# EAGLE board TabStopsDriver (EAGLE 9.6.2)
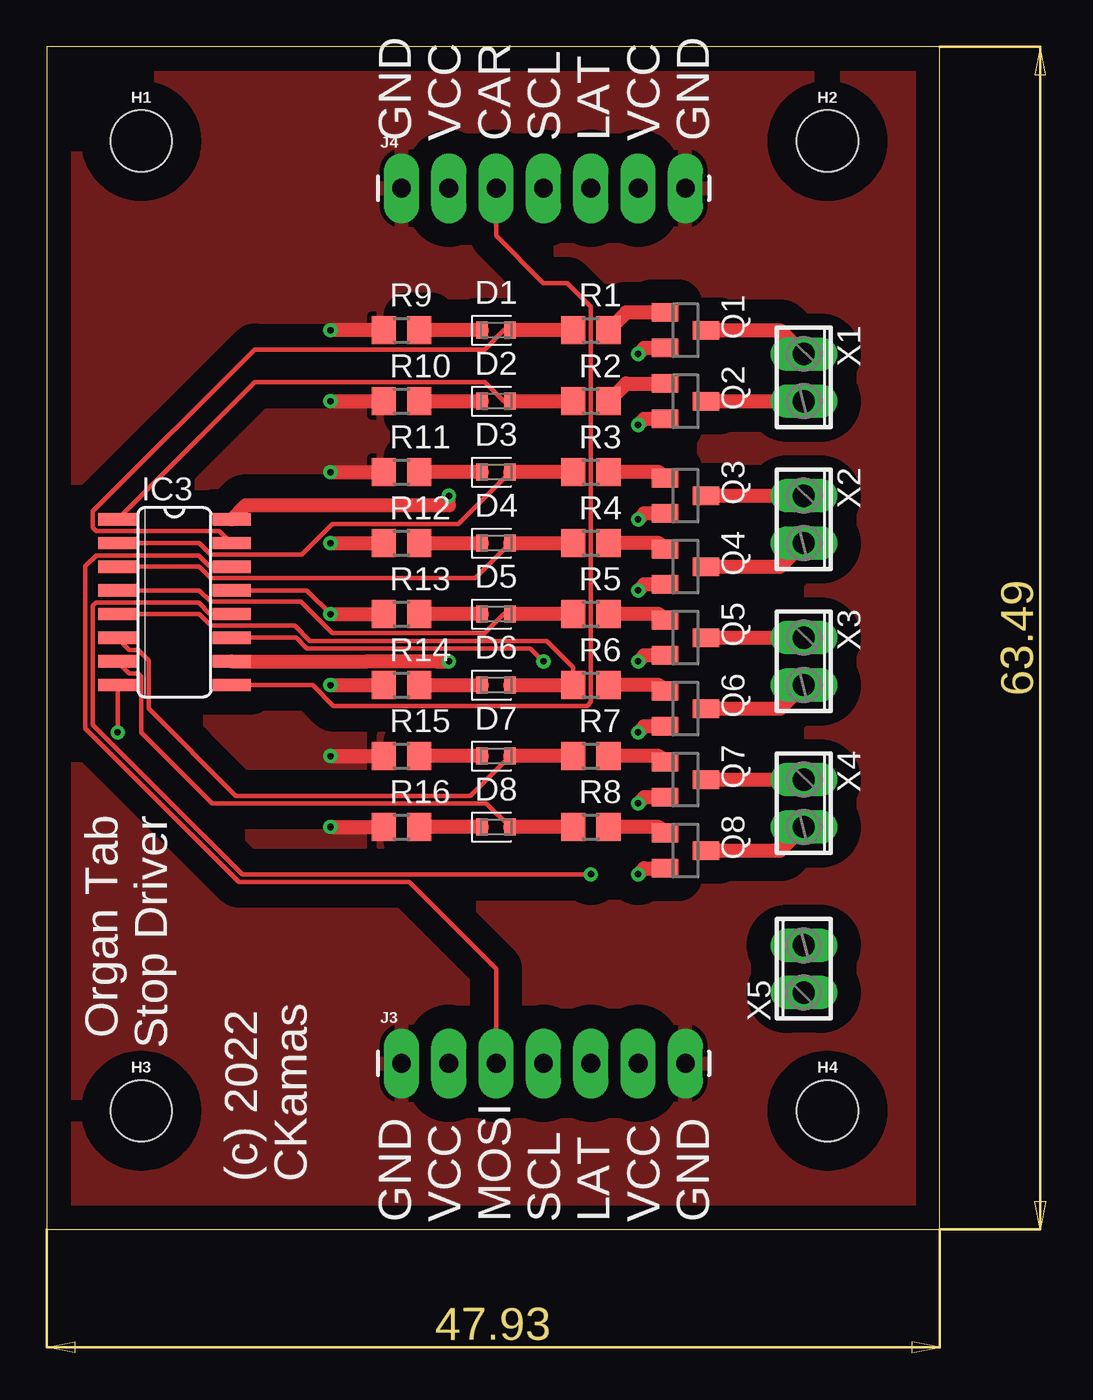
[diagram p0: board, top side]
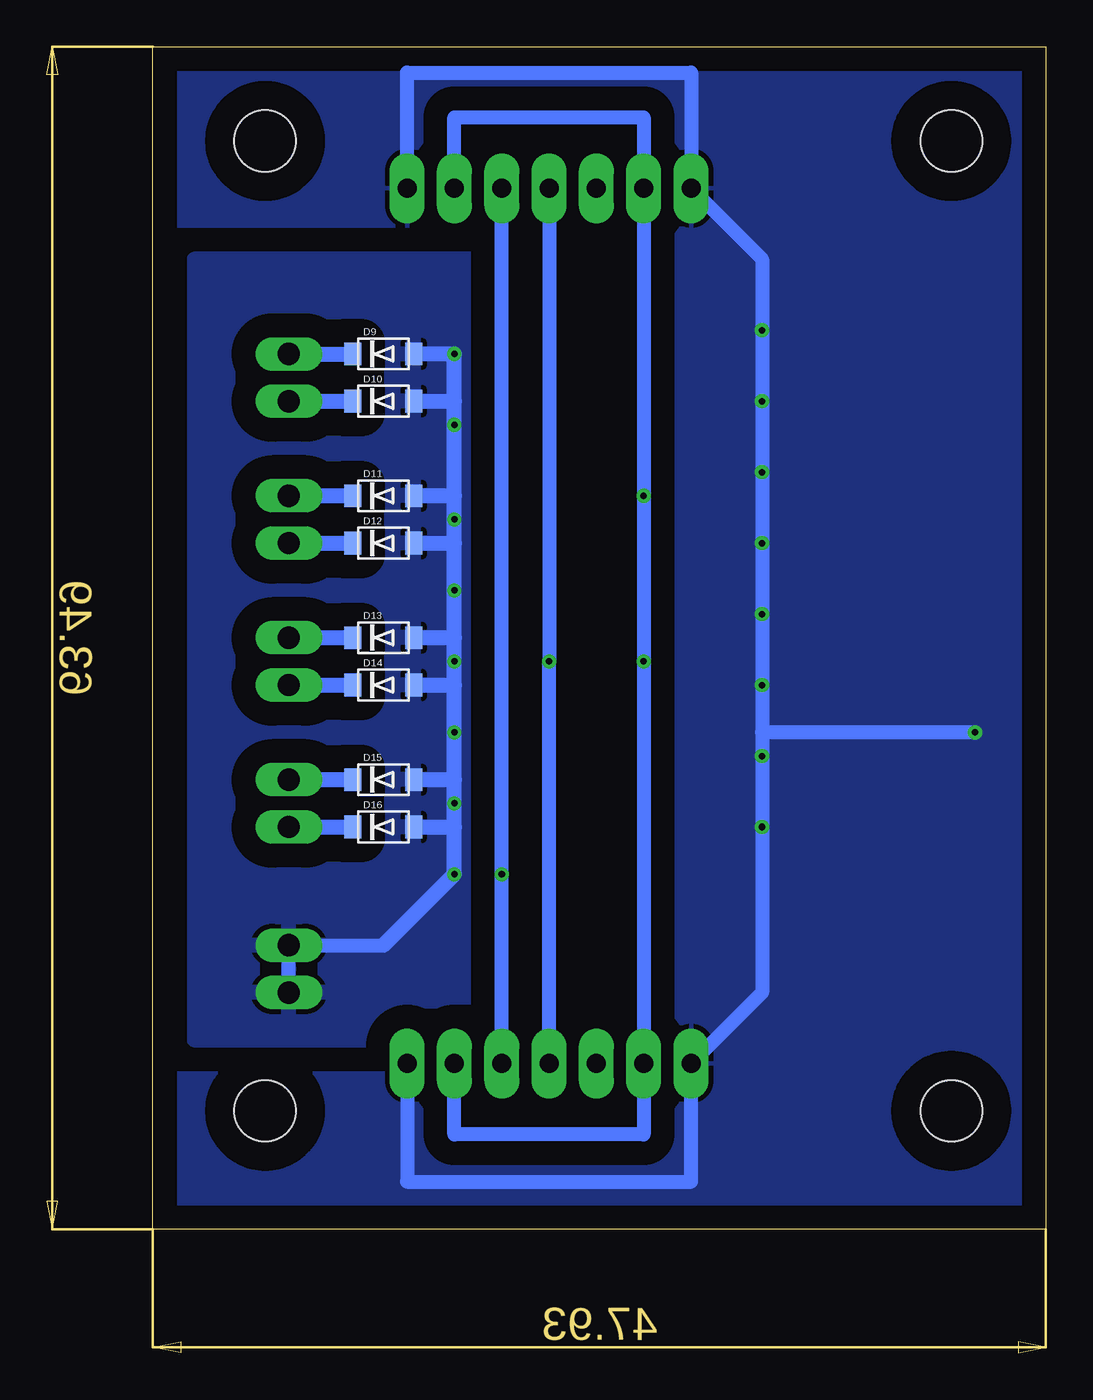
[diagram p1: board, bottom side, seen from below]

Size 47.93 x 63.49 mm. Coordinates in mm from the lower left corner, seen from the top.
Outline: 0,0 47.93,0 47.93,63.49 0,63.49 0,0
Copper layers (1*16): Top 0.035mm / dielectric 1.5mm / Bottom 0.035mm
Design rules "default *": minimum track width 6mil, minimum drill 0.35mm, track to track 6mil, track to pad 6mil, pad to pad 6mil, via to via 6mil, smd to smd 6mil, copper to edge 40mil, drill to drill 6mil, minimum pad ring 10mil, minimum via ring 8mil, stop-mask expansion 4mil, vias tented up to drill 0mil, thermal gap 10mil
Net classes: 0 default: width 0.254 mm; 1 power: width 0.762 mm

## Footprints (pad centres in the part's own frame; a part is rotated, then mirrored left to right if it is on the bottom)
LEDC1608X95N_RND-R = smd 0.612 x 0.912: A 0.75,0; C -0.75,0
SOD-123FL = smd 0.91 x 1.22: A 1.637,0; C -1.637,0
STAND-OFF = hole 3.302: 0,0
SO16 = smd 0.66 x 2.032: 1 -4.445,-3.073; 2 -3.175,-3.073; 3 -1.905,-3.073; 4 -0.635,-3.073; 5 0.635,-3.073; 6 1.905,-3.073; 7 3.175,-3.073; 8 4.445,-3.073; 9 4.445,3.073; 10 3.175,3.073; 11 1.905,3.073; 12 0.635,3.073; 13 -0.635,3.073; 14 -1.905,3.073; 15 -3.175,3.073; 16 -4.445,3.073
1X07_LONGPADS = drill 1.016 pad 1.88 long: 1 0,0; 2 2.54,0; 3 5.08,0; 4 7.62,0; 5 10.16,0; 6 12.7,0; 7 15.24,0
SOT23 = smd 1 x 1.4: 1 -0.95,-1.1; 2 0.95,-1.1; 3 0,1.1
R0805 = smd 1.3 x 1.5: 1 -0.95,0; 2 0.95,0
2POL254 = drill 1.2 long: 1 -1.27,0; 2 1.27,0

## Placement (x,y rotation side)
D1  B1911NB--20C005314U1930  [LEDC1608X95N_RND-R]  24.13,48.26 0 top
D2  B1911NB--20C005314U1930  [LEDC1608X95N_RND-R]  24.13,44.45 0 top
D3  B1911NB--20C005314U1930  [LEDC1608X95N_RND-R]  24.13,40.64 0 top
D4  B1911NB--20C005314U1930  [LEDC1608X95N_RND-R]  24.13,36.83 0 top
D5  B1911NB--20C005314U1930  [LEDC1608X95N_RND-R]  24.13,33.02 0 top
D6  B1911NB--20C005314U1930  [LEDC1608X95N_RND-R]  24.13,29.21 0 top
D7  B1911NB--20C005314U1930  [LEDC1608X95N_RND-R]  24.13,25.4 0 top
D8  B1911NB--20C005314U1930  [LEDC1608X95N_RND-R]  24.13,21.59 0 top
D9  GS1508FL_R1_00001  [SOD-123FL]  35.56,46.99 0 bottom
D10  GS1508FL_R1_00001  [SOD-123FL]  35.56,44.45 0 bottom
D11  GS1508FL_R1_00001  [SOD-123FL]  35.56,39.37 0 bottom
D12  GS1508FL_R1_00001  [SOD-123FL]  35.56,36.83 0 bottom
D13  GS1508FL_R1_00001  [SOD-123FL]  35.56,31.75 0 bottom
D14  GS1508FL_R1_00001  [SOD-123FL]  35.56,29.21 0 bottom
D15  GS1508FL_R1_00001  [SOD-123FL]  35.56,24.13 0 bottom
D16  GS1508FL_R1_00001  [SOD-123FL]  35.56,21.59 0 bottom
H1  STAND-OFF  [STAND-OFF]  5.08,58.42 0 top
H2  STAND-OFF  [STAND-OFF]  41.91,58.42 0 top
H3  STAND-OFF  [STAND-OFF]  5.08,6.35 0 top
H4  STAND-OFF  [STAND-OFF]  41.91,6.35 0 top
IC3  74LS595D  [SO16]  6.86,33.66 270 top
J3  S1111E-07-ND  [1X07_LONGPADS]  19.05,8.89 0 top
J4  S5482-ND  [1X07_LONGPADS]  19.05,55.88 0 top
Q1  3757-PJA3416A_R1_00001CT-ND  [SOT23]  34.29,48.26 270 top
Q2  3757-PJA3416A_R1_00001CT-ND  [SOT23]  34.29,44.45 270 top
Q3  3757-PJA3416A_R1_00001CT-ND  [SOT23]  34.29,39.37 270 top
Q4  3757-PJA3416A_R1_00001CT-ND  [SOT23]  34.29,35.56 270 top
Q5  3757-PJA3416A_R1_00001CT-ND  [SOT23]  34.29,31.75 270 top
Q6  3757-PJA3416A_R1_00001CT-ND  [SOT23]  34.29,27.94 270 top
Q7  3757-PJA3416A_R1_00001CT-ND  [SOT23]  34.29,24.13 270 top
Q8  3757-PJA3416A_R1_00001CT-ND  [SOT23]  34.29,20.32 270 top
R1  RMCF0805FT100RCT-ND  [R0805]  29.21,48.26 0 top
R2  RMCF0805FT100RCT-ND  [R0805]  29.21,44.45 0 top
R3  RMCF0805FT100RCT-ND  [R0805]  29.21,40.64 0 top
R4  RMCF0805FT100RCT-ND  [R0805]  29.21,36.83 0 top
R5  RMCF0805FT100RCT-ND  [R0805]  29.21,33.02 0 top
R6  RMCF0805FT100RCT-ND  [R0805]  29.21,29.21 0 top
R7  RMCF0805FT100RCT-ND  [R0805]  29.21,25.4 0 top
R8  RMCF0805FT100RCT-ND  [R0805]  29.21,21.59 0 top
R9  RMCF0805FT1K50CT-ND  [R0805]  19.05,48.26 0 top
R10  RMCF0805FT1K50CT-ND  [R0805]  19.05,44.45 0 top
R11  RMCF0805FT1K50CT-ND  [R0805]  19.05,40.64 0 top
R12  RMCF0805FT1K50CT-ND  [R0805]  19.05,36.83 0 top
R13  RMCF0805FT1K50CT-ND  [R0805]  19.05,33.02 0 top
R14  RMCF0805FT1K50CT-ND  [R0805]  19.05,29.21 0 top
R15  RMCF0805FT1K50CT-ND  [R0805]  19.05,25.4 0 top
R16  RMCF0805FT1K50CT-ND  [R0805]  19.05,21.59 0 top
X1  277-6156-ND  [2POL254]  40.64,45.72 270 top
X2  277-6156-ND  [2POL254]  40.64,38.1 270 top
X3  277-6156-ND  [2POL254]  40.64,30.48 270 top
X4  277-6156-ND  [2POL254]  40.64,22.86 270 top
X5  277-6156-ND  [2POL254]  40.64,13.97 90 top

## Library data of the parts
D1-D8 = LED; CATEGORY: LED; COLOR: RED; DESCRIPTION: CHIP LED ROUND; SUB-CATEGORY: CHIP; TYPE: ROUND_TOP
D9-D16 Q1-Q8 = adafruit
H1-H4 = SparkFun-Hardware
IC3 = 74xx-us
J3 J4 = SparkFun-Connectors
R1-R16 = rcl; SPICEPREFIX: R
X1-X5 = con-phoenix-254; OC_FARNELL: unknown; OC_NEWARK: unknown

## Nets
A: D1.A IC3.15 R1.1
B: D2.A IC3.1 R2.1
C: D3.A IC3.2 R3.1
CARRY: IC3.9 J4.3
D: D4.A IC3.3 R4.1
E: D5.A IC3.4 R5.1
EGND [power]: D9.A D10.A D11.A D12.A D13.A D14.A D15.A D16.A Q1.2 Q2.2 Q3.2 Q4.2 Q5.2 Q6.2 Q7.2 Q8.2 X5.1 X5.2
F: D6.A IC3.5 R6.1
G: D7.A IC3.6 R7.1
GND: IC3.8 IC3.13 J3.1 J3.7 J4.1 J4.7 R9.1 R10.1 R11.1 R12.1 R13.1 R14.1 R15.1 R16.1
H: D8.A IC3.7 R8.1
LATCH: IC3.12 J3.5 J4.5
MOSI: IC3.14 J3.3
N$2: Q3.1 R3.2
N$6: Q2.1 R2.2
N$7: Q1.1 R1.2
N$8: Q4.1 R4.2
N$9: Q6.1 R6.2
N$10: Q5.1 R5.2
N$11: Q7.1 R7.2
N$12: Q8.1 R8.2
N$21 [power]: D9.C Q1.3 X1.1
N$22 [power]: D10.C Q2.3 X1.2
N$23 [power]: D11.C Q3.3 X2.1
N$24 [power]: D12.C Q4.3 X2.2
N$25 [power]: D13.C Q5.3 X3.1
N$26 [power]: D14.C Q6.3 X3.2
N$27 [power]: D15.C Q7.3 X4.1
N$28 [power]: D16.C Q8.3 X4.2
N$29: D1.C R9.2
N$30: D2.C R10.2
N$31: D3.C R11.2
N$32: D4.C R12.2
N$33: D5.C R13.2
N$34: D6.C R14.2
N$35: D7.C R15.2
N$36: D8.C R16.2
SCL: IC3.11 J3.4 J4.4
VCC: IC3.10 IC3.16 J3.2 J3.6 J4.2 J4.6

## Tracks (layer width: path | path; a pad name or v marks a point on that pad's centre or on a via)
A
  Top 0.254: D1.A 24.54,48.26 23.51,47.23 11.17,47.23 2.49,38.55 2.49,37.65 2.65,37.49 9.27,37.49 IC3.15
  Top 0.762: R1.1 D1.A
B
  Top 0.254: D2.A 24.54,44.45 23.51,45.48 11.16,45.48 IC3.1
  Top 0.762: D2.A R2.1
C
  Top 0.254: IC3.2 8.19,36.83 8.8,36.22 13.7,36.22 15.33,37.86 22.1,37.86 D3.A
  Top 0.762: R3.1 D3.A
CARRY
  Top 0.254: IC3.9 14.28,29.21 15.39,28.09 29.01,28.09 29.21,28.3 29.21,49.53 27.94,50.8 26.67,50.8 24.13,53.34 J4.3
D
  Top 0.254: IC3.3 8.19,35.56 8.8,34.95 23,34.95 D4.A
  Top 0.762: D4.A R4.1
E
  Top 0.254: D5.A 24.54,33.02 23.51,31.99 15.33,31.99 13.65,33.68 8.8,33.68 8.19,34.29 IC3.4
  Top 0.762: R5.1 D5.A
EGND  (via drill 0.35)
  Top 0.762: v31.75,46.99 32.07,47.31 Q1.2 | v31.75,19.05 32.07,19.37 Q8.2 | v31.75,26.67 32.07,26.99 Q6.2 | v31.75,30.48 32.07,30.8 Q5.2 | v31.75,34.29 32.07,34.61 Q4.2 | v31.75,38.1 32.07,38.42 Q3.2 | v31.75,43.18 32.07,43.5 Q2.2 | v31.75,22.86 32.07,23.18 Q7.2
  Bottom 0.762: X5.1 X5.2 35.56,15.24
  Bottom 0.813: 35.56,15.24 v31.75,19.05 31.75,21.59 | 31.75,21.59 31.75,24.13 | 31.75,24.13 31.75,29.21 | 31.75,29.21 31.75,31.75 | 31.75,31.75 31.75,36.83 | 31.75,36.83 31.75,39.37 | 31.75,39.37 31.75,44.45 | 31.75,44.45 v31.75,46.99 D9.A | D10.A 31.75,44.45 | D11.A 31.75,39.37 | D12.A 31.75,36.83 | D13.A 31.75,31.75 | D14.A 31.75,29.21 | D15.A 31.75,24.13 | D16.A 31.75,21.59
  pour Bottom (isolate 1.27): 30.48,52.07 45.72,52.07 45.72,10.16 30.48,10.16
F
  Top 0.254: IC3.5 8.19,33.02 8.8,32.41 13.31,32.41 14.14,31.58 26.84,31.58 28.26,30.16 R6.1
  Top 0.762: D6.A R6.1
G
  Top 0.254: D7.A 22.75,23.27 10.16,23.27 5.49,27.94 5.49,30.52 4.92,31.09 4.45,31.09 IC3.6
  Top 0.762: R7.1 D7.A
GND  (via drill 0.35)
  Top 0.254: IC3.13 13.97,34.29 v15.24,33.02 | IC3.8 3.81,29.19 v3.81,26.67
  Top 0.762: R9.1 v15.24,48.26 | v15.24,44.45 R10.1 | v15.24,40.64 R11.1 | v15.24,36.83 R12.1 | v15.24,33.02 R13.1 | v15.24,29.21 R14.1 | v15.24,25.4 R15.1 | v15.24,21.59 R16.1
  Bottom 0.762: 15.24,26.67 v15.24,29.21 v15.24,33.02 v15.24,36.83 v15.24,40.64 v15.24,44.45 v15.24,48.26 15.24,52.07 J4.1 19.05,62.09 34.29,62.09 J4.7 | 15.24,26.67 v15.24,25.4 v15.24,21.59 15.24,12.7 J3.1 19.05,2.54 34.29,2.54 J3.7 | v3.81,26.67 15.24,26.67
  pour Bottom (isolate 1.27, rank 4): 1.27,62.23 46.99,62.23 46.99,1.27 1.27,1.27
  pour Top (isolate 1.27): 1.27,62.23 46.99,62.23 46.99,1.27 1.27,1.27
H
  Top 0.254: D8.A 23.61,22.86 8.89,22.86 5.08,26.67 5.08,29.66 4.92,29.82 4.45,29.82 IC3.7
  Top 0.762: R8.1 D8.A
LATCH  (via drill 0.35)
  Top 0.254: v29.21,19.05 10.49,19.05 2.49,27.05 2.49,33.47 2.65,33.63 8.15,33.63 8.77,33.02 IC3.12
  Bottom 0.762: J3.5 v29.21,19.05 J4.5
MOSI
  Top 0.254: IC3.14 8.77,35.56 8.15,36.17 2.65,36.17 2.08,35.6 2.08,26.88 10.32,18.64 19.46,18.64 24.13,13.97 J3.3
N$2
  Top 0.762: Q3.1 32.87,40.64 R3.2
N$6
  Top 0.762: R2.2 31.11,45.4 Q2.1
N$7
  Top 0.762: Q1.1 31.11,49.21 R1.2
N$8
  Top 0.762: Q4.1 32.87,36.83 R4.2
N$9
  Top 0.762: Q6.1 32.87,29.21 R6.2
N$10
  Top 0.762: Q5.1 32.87,33.02 R5.2
N$11
  Top 0.762: Q7.1 32.87,25.4 R7.2
N$12
  Top 0.762: Q8.1 32.87,21.59 R8.2
N$21
  Top 0.762: Q1.3 39.37,48.26 X1.1
  Bottom 0.813: X1.1 D9.C
N$22
  Top 0.762: Q2.3 X1.2
  Bottom 0.813: X1.2 D10.C
N$23
  Top 0.762: Q3.3 X2.1
  Bottom 0.813: X2.1 D11.C
N$24
  Top 0.762: Q4.3 39.37,35.56 X2.2
  Bottom 0.813: X2.2 D12.C
N$25
  Top 0.762: Q5.3 X3.1
  Bottom 0.813: X3.1 D13.C
N$26
  Top 0.762: Q6.3 39.37,27.94 X3.2
  Bottom 0.813: X3.2 D14.C
N$27
  Top 0.762: Q7.3 X4.1
  Bottom 0.813: X4.1 D15.C
N$28
  Top 0.762: Q8.3 39.37,20.32 X4.2
  Bottom 0.813: X4.2 D16.C
N$29
  Top 0.762: D1.C R9.2
N$30
  Top 0.762: R10.2 D2.C
N$31
  Top 0.762: D3.C R11.2
N$32
  Top 0.762: R12.2 D4.C
N$33
  Top 0.762: D5.C R13.2
N$34
  Top 0.762: R14.2 D6.C
N$35
  Top 0.762: D7.C R15.2
N$36
  Top 0.762: D8.C R16.2
SCL  (via drill 0.35)
  Top 0.254: IC3.11 13.39,31.75 13.97,31.18 25.97,31.18 v26.67,30.48
  Bottom 0.762: J4.4 v26.67,30.48 J3.4
VCC  (via drill 0.35)
  Top 0.762: IC3.16 10.69,38.86 21.59,38.86 v21.59,39.37 | IC3.10 17.22,30.48 17.23,30.49 20.87,30.49 20.88,30.48 v21.59,30.48
  Bottom 0.762: J4.6 31.75,59.69 21.59,59.69 J4.2 v21.59,39.37 v21.59,30.48 J3.2 21.59,5.08 31.75,5.08 J3.6

## Text on the board
tNames: GND / VCC / CAR / SCL / LAT / VCC / GND | Organ Tab / Stop Driver | (c) 2022 / CKamas | GND / VCC / MOSI / SCL / LAT / VCC / GND